# Altium PCB Video.PCBDOC
Units mm, origin at the board's own origin, x right, y up, seen from the top; angles counter-clockwise.
Board outline 152.4 x 101.6 mm, 2 copper layers (Top Layer, Bottom Layer); 33 components, 19 nets, 95 pads, 16 vias.
Unrouted connection lines stored in the file: 2.
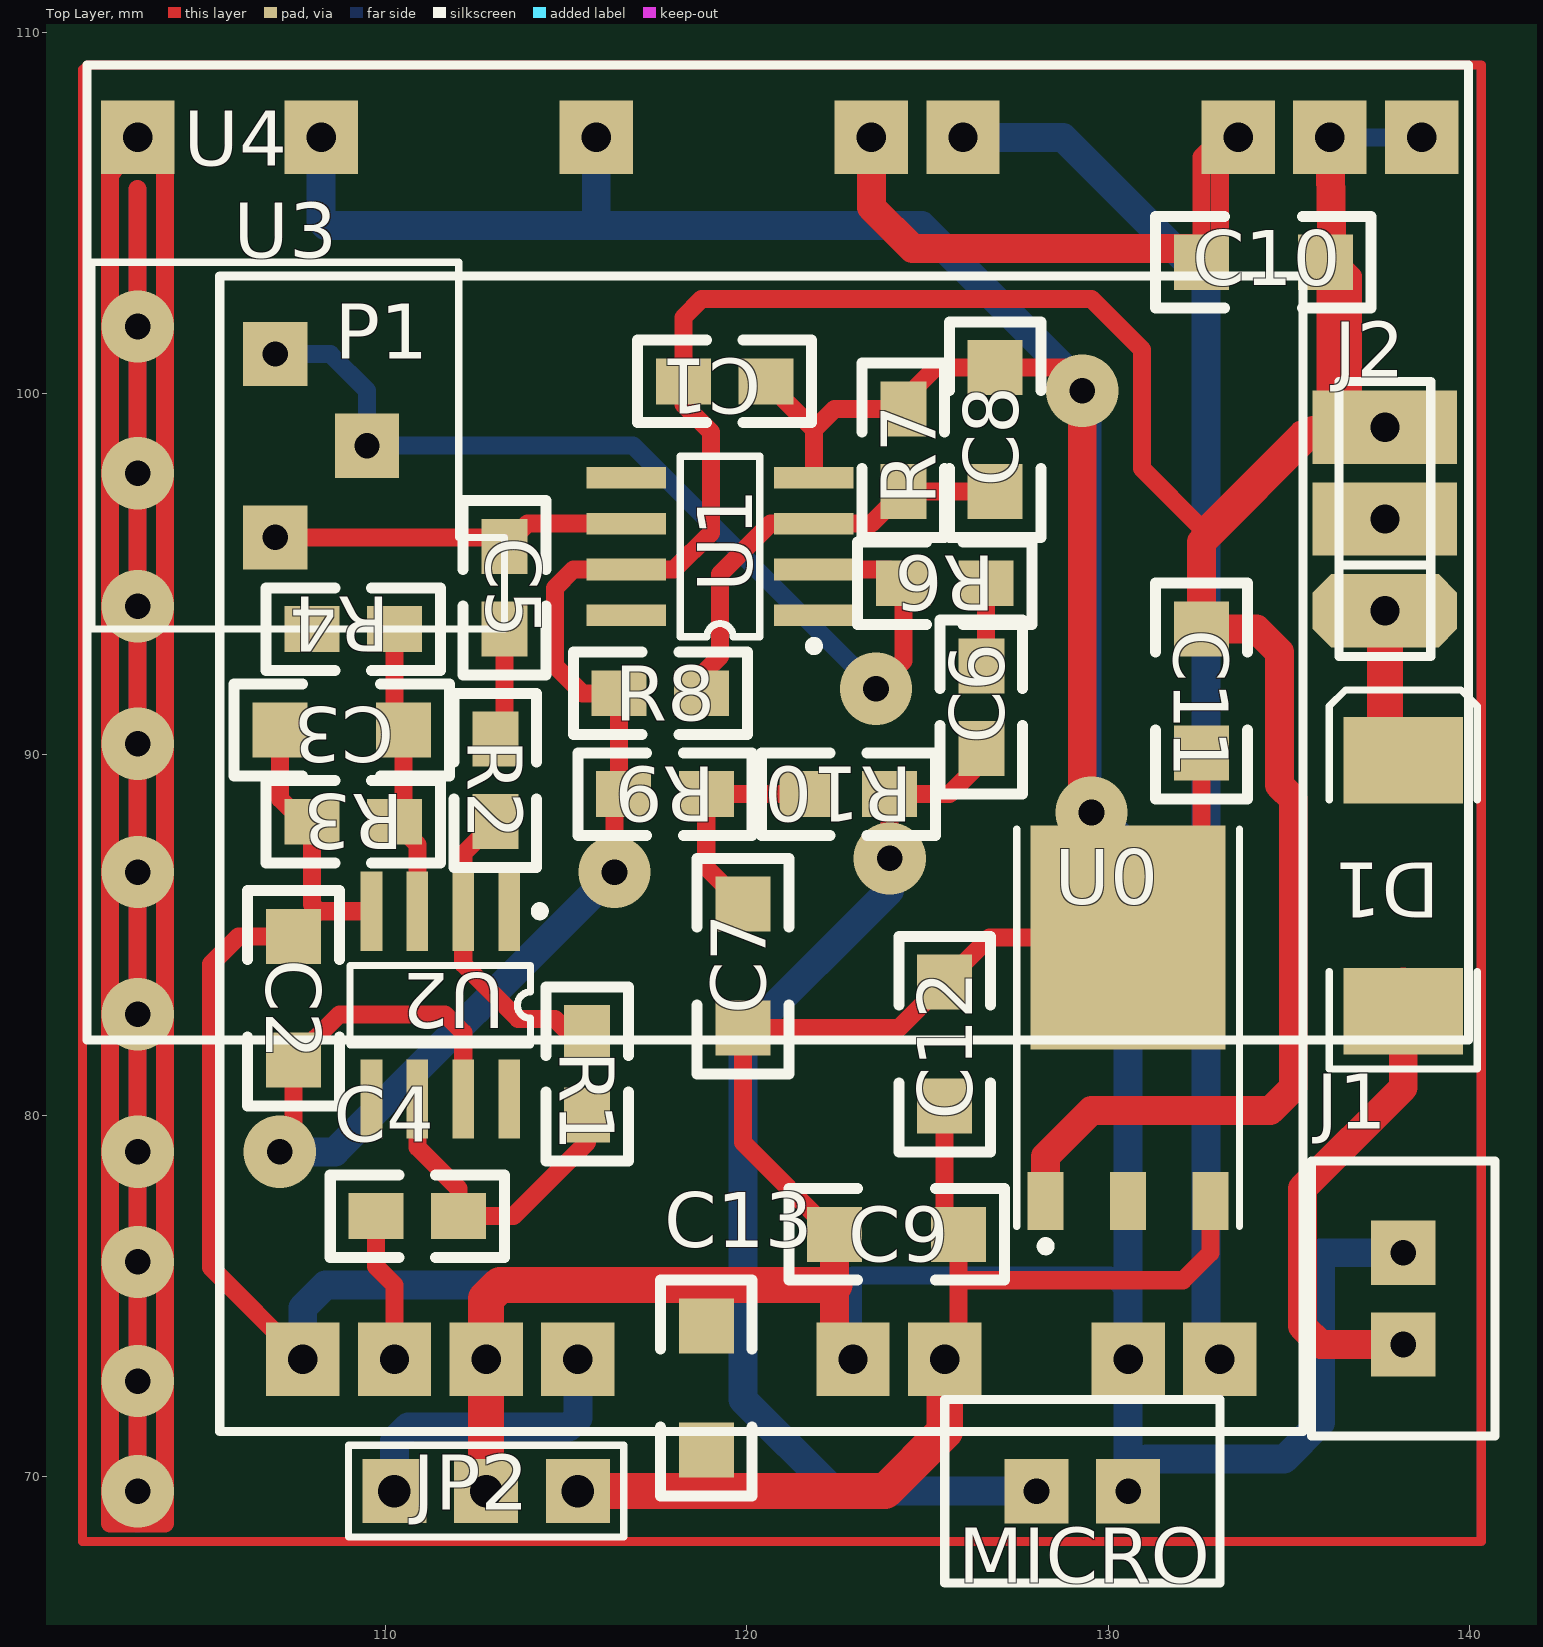
[diagram p0: Top Layer view]
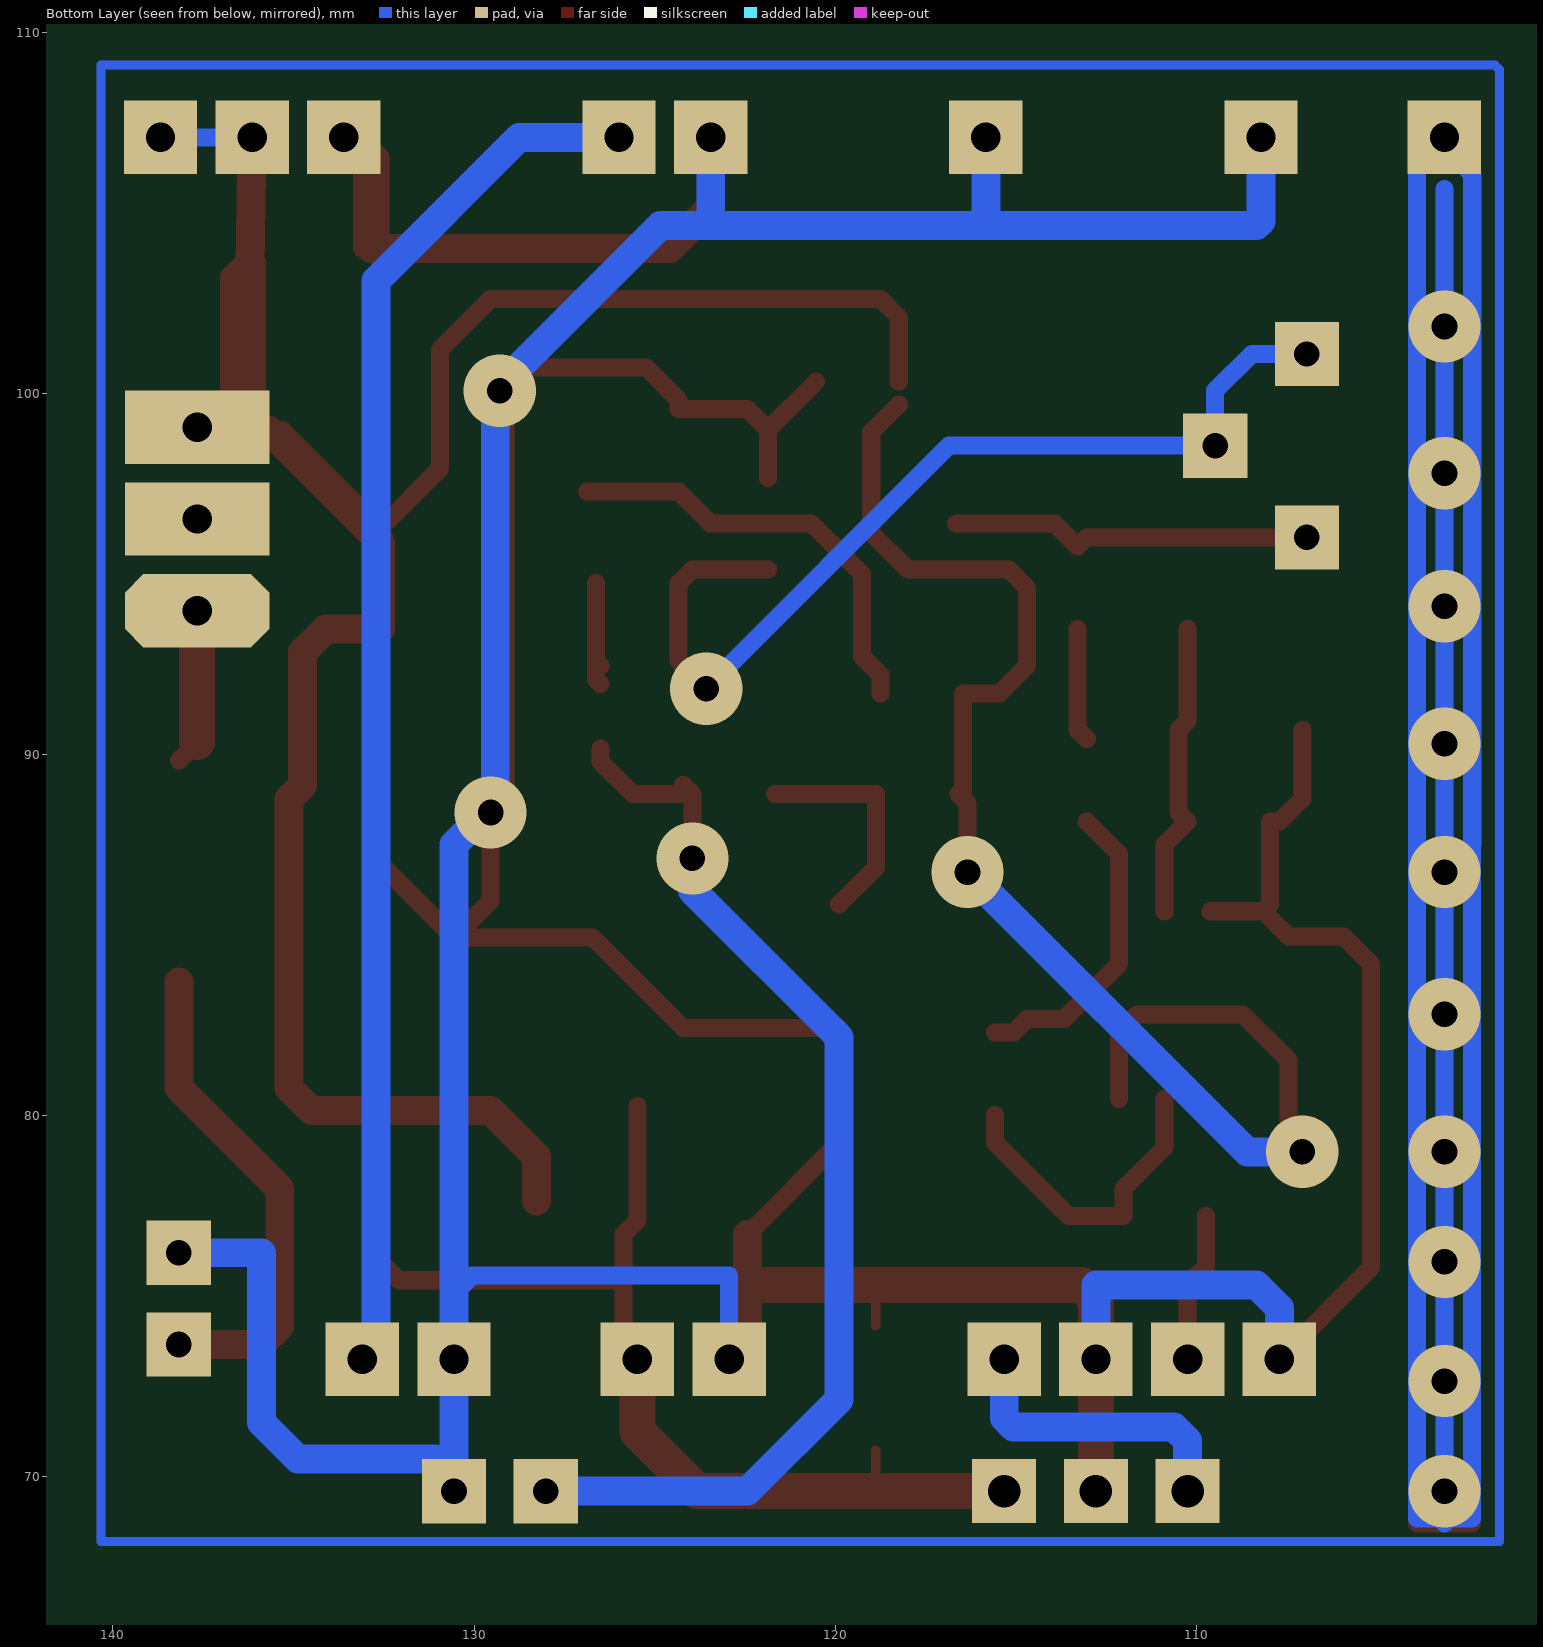
[diagram p1: Bottom Layer view, seen from below]

## Layer stack, top to bottom
Top Layer: signal copper 0.0356
Dielectric: dielectric 0.32, FR-4, Dk 4.8
Bottom Layer: signal copper 0.0356

## Board outline
25.4,25.4 177.8,25.4 177.8,127 25.4,127

## Design rules (kind name [scope] priority, off if disabled: settings)
Clearance [All] p1 off: gap=0.1
ComponentClearance [All] p1 off: gap=0.254 collisioncheckmode=0
PolygonConnect [All] p1: connectstyle=Relief reliefconductorwidth=0.254 reliefentries=4 polygonreliefangle="90 Angle"
RoutingLayers [All] p1: top layer=Horizontal bottom layer=Vertical
RoutingVias [All] p1: holewidth=0.711 width=1.27 viastyle="Through Hole" minholewidth=0.711 minwidth=1.27 maxholewidth=0.711 maxwidth=1.27
SolderMaskExpansion [All] p1: expansion=0.102
TestPointUsage [All] p1: valid=0 allowmultiple=FALSE
Testpoint [All] p1: side=15 testpointundercomponent=TRUE minsize=1.016 maxsize=2.54 preferedsize=1.524 minholesize=0 maxholesize=1.016 preferedholesize=0.813 testpointgrid=0.025 style=1023 order=-539222988
Width [All] p1: maxlimit=1 minlimit=0.5 preferedwidth=0.5
16 further rules are at their usual default settings.

## Components (designator, comment, footprint, x,y, rotation, side; value= is the part's Value field where it differs from the comment)
C1 "Cap" 0805 118.237,100.33 r0 top
C2 "Cap" 1206 107.442,81.534 r90 top
C3 "Cap Pol1" 1206 110.49,90.678 r180 top
C4 "Cap" 0805 109.728,77.216 r0 top
C5 "Cap" 0805 113.284,93.472 r90 top
C6 "Cap" 0805 126.492,92.456 r270 top
C7 "Cap Pol1" 1206 119.888,85.852 r270 top
C8 "Cap Pol1" 1206 126.873,97.282 r90 top
C9 "Cap" 1206 122.428,76.708 r0 top
C10 "Cap" 1206 132.588,103.632 r0 top
C11 "Cap Pol1" 1206 132.588,93.472 r270 top
C12 "Cap Pol1" 1206 125.476,80.264 r90 top
C13 "Cap" 1206 118.872,74.168 r270 top
D1 "Diode" DSO-C2/X3.3 138.176,86.36 r90 top
J1 "12V" CON2 138.176,71.12 r270 top
J2 "INT" TSIP3 137.668,93.98 r90 top
JP2 "Header 3" HDR1X3 110.236,69.596 r0 top
MICRO "12V" CON2 133.096,69.596 r0 top
P1 "TPOT" VR4 108.204,98.552 r270 top
R1 "Res2" 0805 115.57,80.01 r90 top
R2 "Res2" 0805 113.03,88.138 r90 top
R3 "Res2" 0805 107.95,88.138 r0 top
R4 "Res2" 0805 110.236,93.472 r180 top
R6 "Res2" 0805 124.333,94.742 r0 top
R7 "Res2" 0805 124.333,97.282 r90 top
R8 "Res2" 0805 118.745,91.694 r180 top
R9 "Res2" 0805 118.872,88.9 r180 top
R10 "Res2" 0805 123.952,88.9 r180 top
U0 "MC78M05CDT" 369A-03 130.556,81.28 r0 top
U1 "TL081ACD" 751-02 119.253,95.758 r90 top
U2 "TL081ACD" 751-02 111.506,83.058 r180 top
U3 "MAV-VHF224" MAV-VHF224 120.396,79.248 r0 top
U4 "MAC224" MCA224 125.984,101.092 r180 top

## Footprints (in the part's own frame and the unit in brackets; to place one, negate y for a bottom-side part, rotate by r counter-clockwise, add the part's x,y. Pads: shape width x height; smd on the part's side, far side on the other; paste and mask are expansions set on the pad)
369A-03 [mm] "D-PAK/TO-252-AA; 3 Leads (1 Cropped); Body 10.2 (inc. leads) x 6.7 mm (LxW max)"
  rect 1x1.6 smd: 1(-2.285,-3.65) 2(0,-3.65) 3(2.285,-3.65)
  rect 5.4x6.2 smd: 4(0,3.65)
  silkscreen extent -3.09,-5.02 3.09,6.65
751-02 [mm] "Small Outline; 8 Leads; Body Width 3.9 mm; Pitch 1.27 mm"
  rect 0.6x2.2 smd: 1(-1.905,-2.6) 2(-0.635,-2.6) 3(0.635,-2.6) 4(1.905,-2.6) 5(1.905,2.6) 6(0.635,2.6) 7(-0.635,2.6) 8(-1.905,2.6)
  silkscreen extent -2.88,-2.72 2.5,1.1
0805 [mil]
  rect 60x50 smd: 1(0,0) 2(90,0)
  silkscreen extent -50,-45 140,45
1206 [mil]
  rect 60x60 smd: 1(0,0) 2(135,0)
  silkscreen extent -50,-50 185,50
CON2 [mil]
  rect 70x70 hole 28: 1(-200,0) 2(-100,0)
  silkscreen extent -300,-100 0,100
DSO-C2/X3.3 [mm]
  rect 2.4x3.3 smd: 1(-3.475,0) 2(3.475,0)
  silkscreen extent -5.07,-2.05 5.43,2.05
HDR1X3 [mm] "Connector; Header; 3 Position"
  rect 1.774x1.774 hole 0.9: 1(0,0) 2(2.54,0) 3(5.08,0)
  silkscreen extent -1.27,-1.27 6.35,1.27
MAV-VHF224 [mil]
  rect 80x80 hole 32: 1(-500,-236.22) 2(-400,-236.22) 3(-300,-236.22) 4(-200,-236.22) 7(100,-236.22) 8(200,-236.22) 10(400,-236.22) 11(500,-236.22)
  silkscreen extent -591,-315 591,945
MCA224 [mil]
  rect 80x80 hole 32: 1(-500,-236.22) 2(-400,-236.22) 3(-300,-236.22) 6(0,-236.22) 7(100,-236.22) 10(400,-236.22) 13(700,-236.22) 15(900,-236.22)
  silkscreen extent -551,-315 955,748
TSIP3 [mil]
  oct 80x157.48 hole 32: 1(0,0)
  rect 80x157.48 hole 32: 2(100,0) 3(200,0)
  silkscreen extent -50,-50 250,50
VR4 [mil]
  rect 70x70 hole 27.56: 1(-100,-50) 2(0,50) 3(100,-50)
  silkscreen extent -200,-250 200,200

## Part data
C1 C2 C4 C5 C6 C9 C10 C13: "Capacitor"
C3 C7 C8 C11 C12: "Polarized Capacitor (Radial)"
D1: "Default Diode"
J1 MICRO: library part CON2
J2: library part TCON3
JP2: "Header, 3-Pin"
P1: "Potentiometre"
R1 R2 R3 R4 R6 R7 R8 R9 R10: "Resistor"
U0: "3-Terminal Medium-Current Positive Fixed Voltage Regulator"
U1 U2: "JFET-Input Operational Amplifier"

## Via types
v1: diameter 2, hole 0.711, Top Layer to Bottom Layer, 16 vias

## Nets (pads, with @x,y where several pads share a name; then routed paths per layer and width w, separated by ;. In a path a pad name is that pad's centre, name@x,y a point inside that pad or via, vN(x,y) a via of type N, cw(c..) or ccw(c..) an arc to the next point about the centre after c; other vN are vias at no path point)
5V: C9.2 C12.1 C13.2 JP2.3 U0.3 U3.8 | length 30
  Top Layer w0.254: 118.872,69.596 C13.2
  Top Layer w0.5: C12.1 125.476,77.089 C9.2 U3.8@125.857,73.629 ; 125.857,75.438 132.08,75.438 132.841,76.199 U0.3
  Top Layer w1: JP2.3 123.825,69.596 125.476,71.247 U3.8 U3.8@125.857,73.629
12V: C1.1 C2.1 C10.2 C11.1 J2.2 J2.3 R4.2 R8.2 R9.2 U0.1 U1.7 U2.7 U4.1 U4.2 | length 118.9
  Top Layer w0.5: v1(107.061,78.994) 107.442,79.375 C2.1 108.712,82.804 111.633,82.804 112.141,82.296 U2.7 ; v1(116.332,86.741) 116.332,88.646 R9.2 116.459,89.027 R8.2 115.443,91.694 114.681,92.456 114.681,94.615 115.189,95.123 117.983,95.123 118.999,96.139 118.999,98.933 C1.1@118.237,99.695 ; C1.1 118.237,102.108 118.745,102.616 129.54,102.616 130.937,101.219 130.937,97.917 132.588,96.266 135.301,98.979 J2.3@135.682,98.979 ; C10.2@136.144,103.759 C10.2 ; J2.3@136.398,99.695 136.017,100.076 C10.2 ; J2.3@136.652,99.187 J2.3@136.652,99.695 ; J2.3@136.779,99.06 136.779,103.251 136.398,103.632 C10.2
  Top Layer w0.8: U0.1 128.271,78.868 129.54,80.137 134.493,80.137 135.128,80.772 135.128,88.773 134.747,89.154 134.747,92.837 134.112,93.472 C11.1 132.588,95.885 135.682,98.979 137.16,99.06 136.271,99.06 U4.2
  Bottom Layer w0.5: U4.2 U4.1
  Bottom Layer w0.8: v1(107.061,78.994) 108.585,78.994 v1(116.332,86.741)
AUDIO_IN: C4.1 U3.2 | length 4.2
  Top Layer w0.5: C4.1 109.728,75.819 110.236,75.311 U3.2
GND: C1.2 C2.2 C3.2 C7.2 C8.2 C9.1 C10.1 C11.2 C12.2 C13.1 J1.1 JP2.2 MICRO.2 R3.1 R7.2 U0.4 U1.4 U2.4 U3.1 U3.3 U3.7 U3.10 U4.3 U4.7 U4.10 U4.13 | length 211.5
  Top Layer w0.254: C13.1 118.872,75.311
  Top Layer w0.5: C3.2 107.061,88.773 107.696,88.138 R3.1 107.95,85.845 C2.2@108.137,85.658 ; U3.1 105.156,75.788 105.156,84.201 105.918,84.963 C2.2 C2.2@108.137,85.658 ; U2.4 C2.2@108.137,85.658 ; C1.2 121.853,99 ; U1.4 121.853,99 ; U3.7@122.428,72.74 U3.7 U3.7@122.428,73.756 ; C9.1 119.888,79.248 C7.2 124.206,82.423 126.713,84.93 U0.4 ; v1@129.54,88.646 129.54,85.946 U0.4 ; v1@129.54,100.076 129.54,100.457 129.286,100.711 C8.2 125.222,100.711 124.333,99.822 R7.2 122.421,99.568 121.853,99 ; C11.2 132.588,86.962 U0.4 ; C10.1 132.588,106.553 133.127,107.092 U4.3 133.096,106.584 C10.1@133.096,104.013
  Top Layer w0.8: C9.1 122.428,73.756 U3.7 ; U4.7 123.444,105.156 124.587,104.013 C10.1@132.842,104.013 ; v1(129.286,100.076) 129.286,88.773 v1@129.413,88.646
  Top Layer w1: JP2.2 U3.3 112.776,74.93 113.157,75.311 122.428,75.311
  Bottom Layer w0.5: U3.3 U3.3@112.776,73.406 ; U3.7 122.936,75.565 130.048,75.565 130.556,75.057 ; 123.444,104.775 U4.7
  Bottom Layer w0.8: U3.1 107.696,74.676 108.331,75.311 112.776,75.311 U3.3@112.776,73.406 ; U4.13 108.204,104.775 108.331,104.648 124.841,104.648 129.286,100.203 v1(129.286,100.076) 129.413,99.949 129.413,88.646 130.556,87.503 MICRO.2 131.064,70.485 134.874,70.485 135.89,71.501 135.89,76.2 J1.1 ; 115.824,104.648 U4.10 ; 123.444,104.648 U4.7
  other v1: 129.54,88.392
NetC3_1: C3.1 R3.2 R4.1 U2.3 | length 8.3
  Top Layer w0.5: R4.1 110.236,90.932 C3.1 110.49,88.392 R3.2 110.871,87.503 U2.3
NetC4_2: C4.2 R1.1 U2.6 | length 8.9
  Top Layer w0.5: U2.6 110.871,79.121 112.014,77.978 C4.2 113.538,77.216 115.57,79.248 R1.1
NetC5_1: C5.1 R2.2 | length 3.2
  Top Layer w0.5: R2.2 113.284,90.678 C5.1
NetC5_2: C5.2 P1.3 U1.6 | length 10.1
  Top Layer w0.5: P1.3 113.03,96.012 C5.2 113.919,96.393 U1.6
NetC6_1: C6.1 R6.2 | length 3
  Top Layer w0.5: C6.1@126.492,91.948 126.619,92.075 R6.2 ; C6.1 C6.1@126.619,92.583
NetC6_2: C6.2 MICRO.1 R10.1 | length 31.4
  Top Layer w0.5: v1(123.952,87.122) R10.1 ; R10.1@124.206,89.154 R10.1 ; C6.2 126.492,89.789 125.603,88.9 R10.1
  Bottom Layer w0.5: v1@123.825,87.122 v1(123.952,87.122)
  Bottom Layer w0.8: v1(123.952,87.122) 123.952,86.233 119.888,82.169 119.888,72.136 122.428,69.596 MICRO.1
NetC7_1: C7.1 R9.1 R10.2 | length 6.3
  Top Layer w0.5: C7.1 118.872,86.868 R9.1 R10.2
NetC8_1: C8.1 R7.1 R8.1 U1.3 | length 12.1
  Top Layer w0.5: R8.1 118.745,92.202 119.253,92.71 119.253,94.996 120.65,96.393 123.444,96.393 R7.1 C8.1
NetD1_1: D1.1 J1.2 | length 13.7
  Top Layer w0.8: J1.2 135.89,73.66 135.382,74.168 135.382,77.978 138.176,80.772 D1.1@138.176,83.693
NetD1_2: D1.2 J2.1 | length 4.4
  Top Layer w0.5: D1.2@137.668,90.343 D1.2
  Top Layer w1: D1.2@137.668,90.343 J2.1
NetJP2_1: JP2.1 U3.4 | length 8.4
  Bottom Layer w0.8: JP2.1 110.236,70.993 110.617,71.374 115.062,71.374 115.316,71.628 U3.4
NetP1_1: P1.1 P1.2 R6.1 U1.2 | length 26.9
  Top Layer w0.5: U1.2 123.952,95.123 R6.1 124.333,92.583 v1(123.571,91.821)
  Bottom Layer w0.5: P1.1 108.458,101.092 109.474,100.076 P1.2@109.474,98.933 ; P1.2 116.84,98.552 v1(123.571,91.821)
NetP3_1: U4.15 | length 231.4
  Top Layer w0.5: v1@103.124,68.707 103.124,105.664 ; 102.362,68.707 102.362,106.045 U4.15 103.124,107.061 103.886,106.299 103.886,68.707 102.362,68.707
  Bottom Layer w0.5: v1@103.124,68.707 103.124,105.664 ; U4.15@103.124,107.061 102.353,106.036 102.362,68.834 103.886,68.834 103.886,106.172 103.124,106.934 U4.15
  other v1: 103.124,69.596 103.124,72.644 103.124,75.946 103.124,78.994 103.124,82.804 103.124,86.741 103.124,90.297 103.124,94.107 103.124,97.79 103.124,101.854
NetR1_2: R1.2 R2.1 U2.2 | length 8.5
  Top Layer w0.5: R2.1 112.141,87.249 112.141,84.201 113.665,82.677 114.681,82.677 115.062,82.296 R1.2
NetU3_11: U3.11 U4.6 | length 38.4
  Bottom Layer w0.8: U4.6 128.747,107.092 132.715,103.124 132.715,73.629 U3.11
pads on no net: U0.2 U1.1 U1.5 U1.8 U2.1 U2.5 U2.8

## Other copper
Multi-Layer:
  lines w0.254: 101.6,68.199 139.7,68.199 140.335,68.199 140.335,68.58 140.335,109.093 101.727,109.093 101.6,108.966 101.6,104.267 101.6,68.199

## Silkscreen, mask and mechanical layers (free items; w line width, h text height)
Mechanical 1:
  lines w0.254: 101.6,65.278 101.6,65.786 ; 103.124,65.024 101.6,65.532 ; 103.124,66.04 101.6,65.532 ; 112.944,65.532 101.6,65.532 ; 128.991,65.532 140.335,65.532 ; 138.811,65.024 140.335,65.532 ; 138.811,66.04 140.335,65.532 ; 140.335,65.278 140.335,65.786 ; 141.732,69.723 142.24,68.199 ; 141.732,107.569 142.24,109.093 ; 141.986,68.199 142.494,68.199 ; 141.986,109.093 142.494,109.093 ; 142.24,80.622 142.24,68.199 ; 142.24,96.67 142.24,109.093 ; 142.748,69.723 142.24,68.199 ; 142.748,107.569 142.24,109.093
  text "40.894 (mm)" at 143.154,80.876 h1.52 r90
  text "38.735 (mm)" at 113.198,64.618 h1.52